# Altium PCB 2.0_GIT_SCHEMATIC.PcbDoc
Units mil, origin at the board's own origin, x right, y up, seen from the top; angles counter-clockwise.
Board outline 6000 x 4000 mil, 2 copper layers (Top Layer, Bottom Layer); 10 components, 12 nets, 49 pads, 0 vias.
Unrouted connection lines stored in the file: 3.
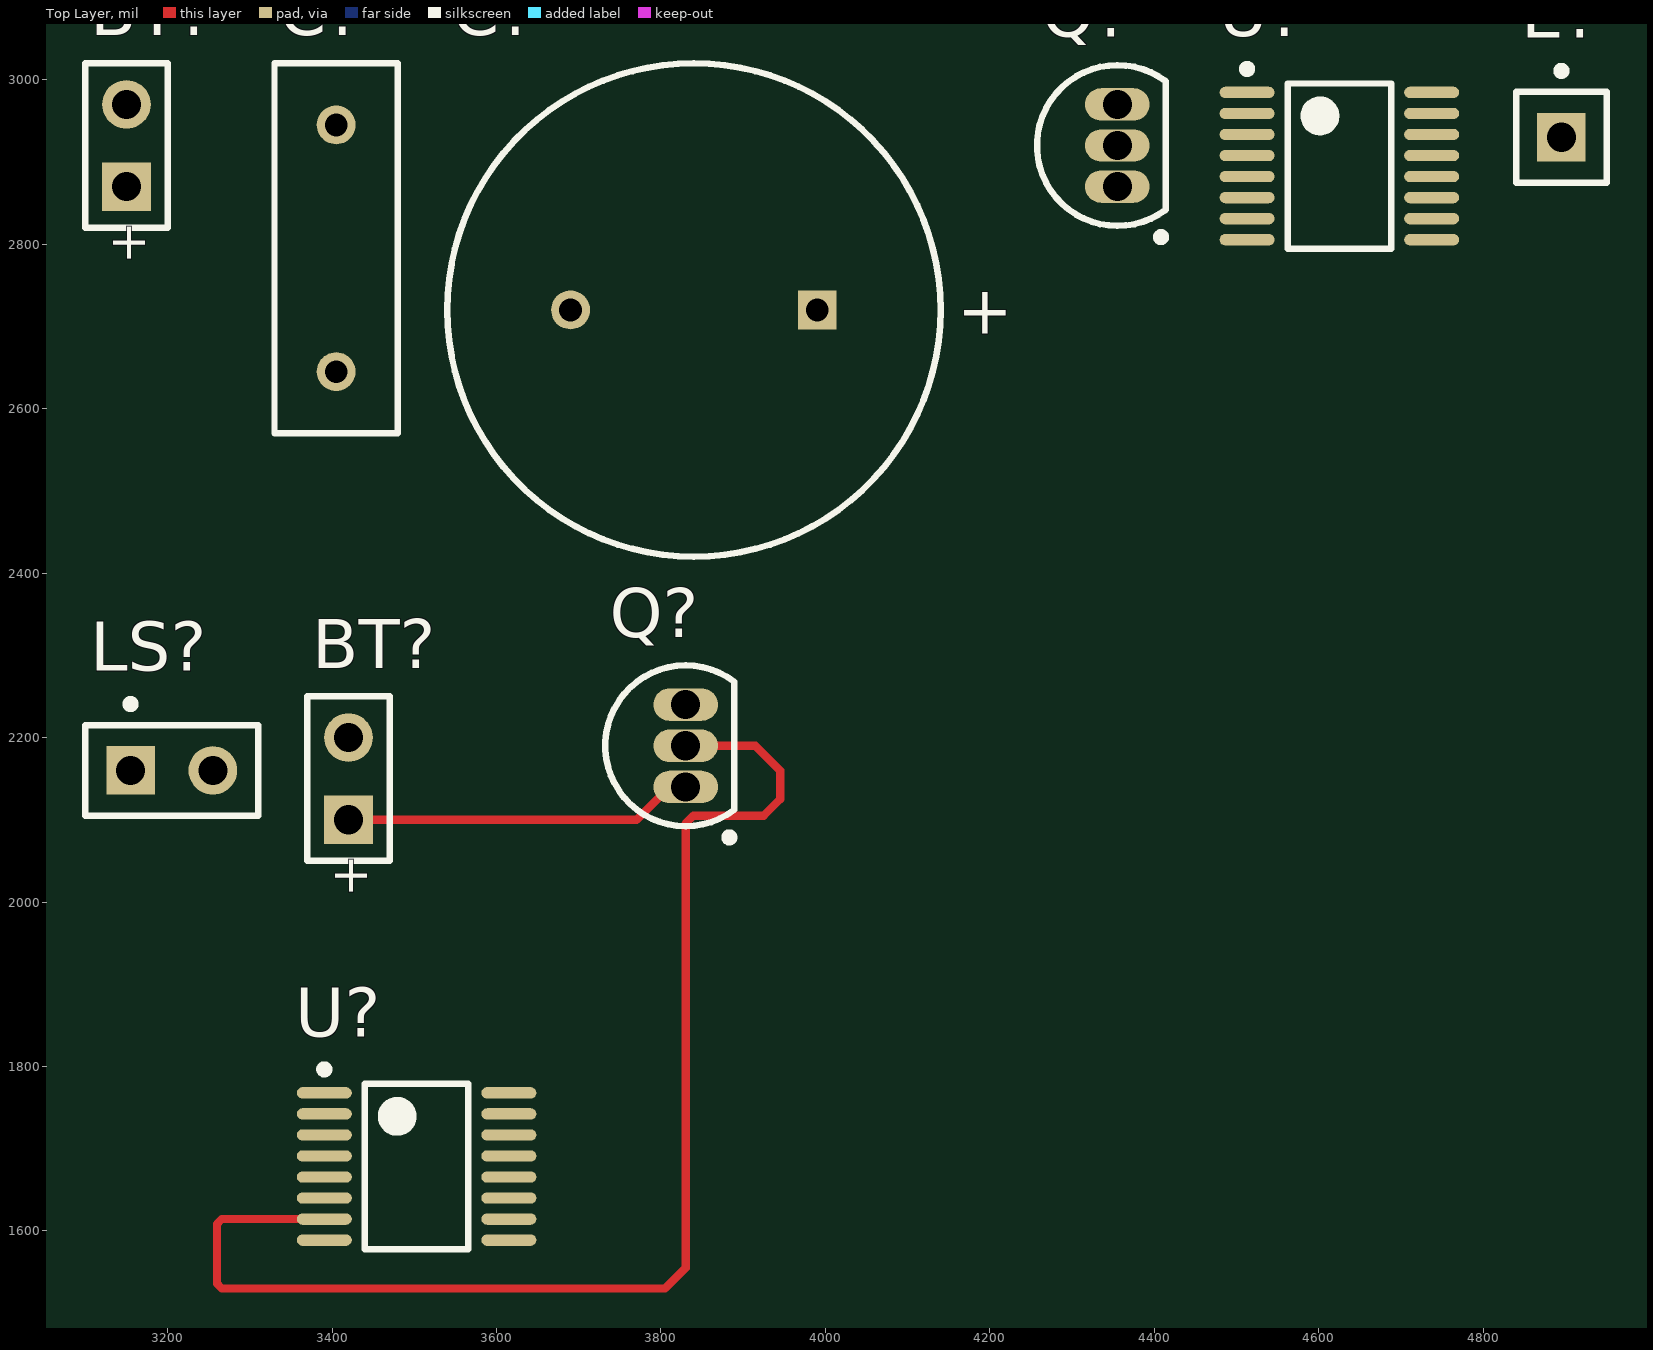
[diagram p0: Top Layer view]
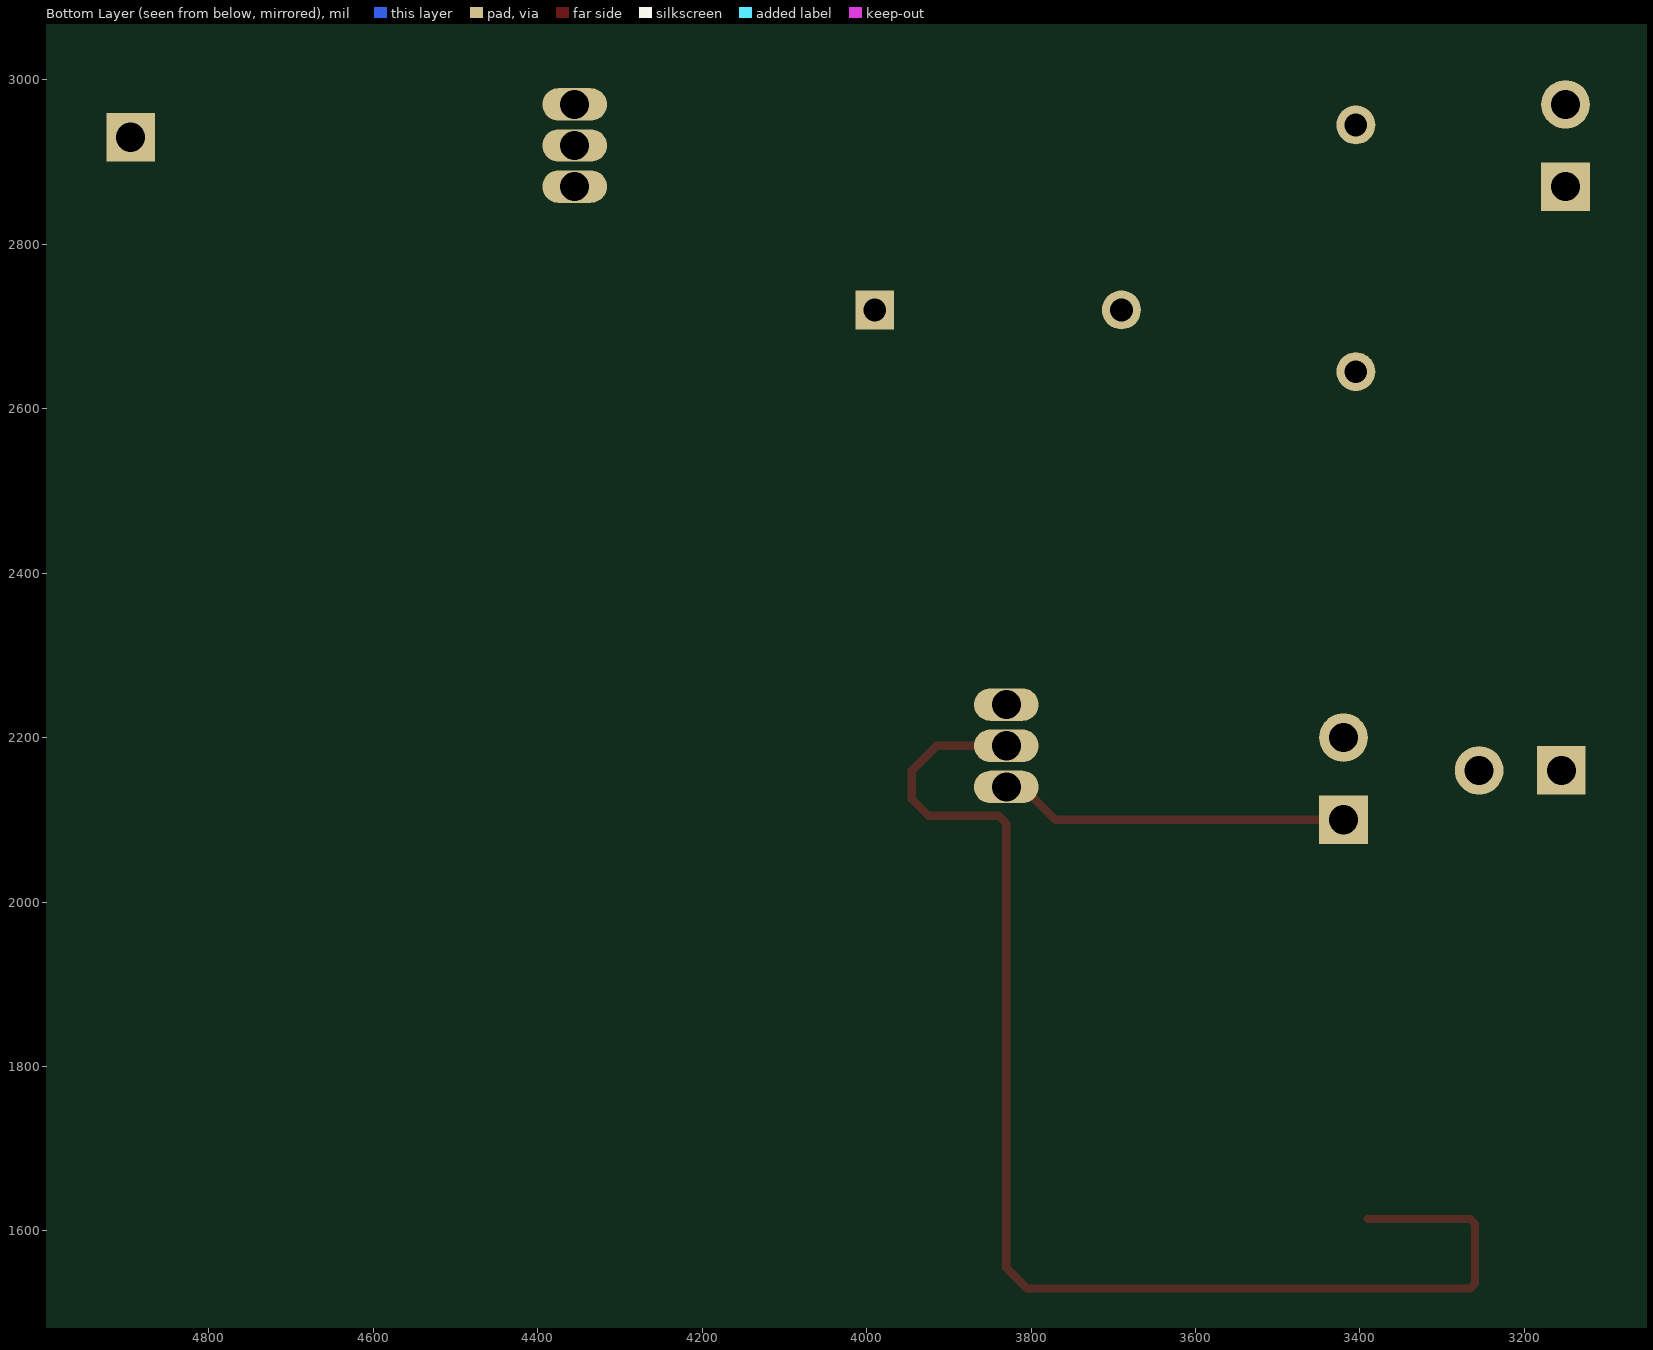
[diagram p1: Bottom Layer view, seen from below]

## Layer stack, top to bottom
Top Solder: solder mask 0.4, Solder Resist, Dk 3.5
Top Layer: signal copper 1.4
Dielectric 1: dielectric 12.6, FR-4, Dk 4.8
Bottom Layer: signal copper 1.4
Bottom Solder: solder mask 0.4, Solder Resist, Dk 3.5

## Board outline
1000,1000 7000,1000 7000,5000 1000,5000

## Design rules (kind name [scope] priority, off if disabled: settings)
Clearance [All] p1: gap=10 ignorepadtopadclearanceinfootprint=FALSE except(0: Arc-Hole Track-Hole SMDPad-Hole THPad-Hole Via-Hole Fill-Hole Poly-Hole Region-Hole Text-Hole)
PolygonConnect [All] p1: connectstyle=Relief reliefconductorwidth=10 reliefentries=4 polygonreliefangle="90 Angle" airgapwidth=10
RoomDefinition GIT_SCHEMATICS_TEST_PCB [InComponentClass('GIT_SCHEMATICS_TEST_PCB')] p1: confinementstyle=ConfineIn formatcopy=TRUE lockcomponents=FALSE outline 7045,1060 8920,1060 8920,2200 7045,2200
RoomDefinition 2.0_GIT_SCHEMATIC [InComponentClass('2.0_GIT_SCHEMATIC')] p2: confinementstyle=ConfineIn formatcopy=TRUE lockcomponents=FALSE outline 2972.2,2019.57 4672.2,2019.57 4672.2,3159.57 2972.2,3159.57
RoutingVias [All] p1: holewidth=28 width=50 viastyle="Through Hole" minholewidth=28 minwidth=50 maxholewidth=28 maxwidth=50
SolderMaskExpansion [All] p1: expansion=4 istentingtop=FALSE
Width [All] p1: maxlimit=10 minlimit=10 preferedwidth=10
30 further rules are at their usual default settings.

## Classes and differential pairs
net class TS_O: Vo
net class TS_DC-: DC-
net class TS_DC+: DC+
component class GIT_SCHEMATICS_TEST_PCB: BT? C? E? IGBT? Q? U?
component class 2.0_GIT_SCHEMATIC: BT? LS? Q? U?

## Components (designator, comment, footprint, x,y, rotation, side; value= is the part's Value field where it differs from the comment)
BT? "Battery" BAT-2 3420,2150 r90 top
BT? "Battery" BAT-2 3150,2920 r90 top
C? "Cap Pol1" RB7.6-15 3840,2720 r0 top value=100pF
C? "Cap" RAD-0.3 3405,2795 r90 top value=100pF
E? "Antenna" PIN1 4895,2930 r0 top
LS? "Bell" PIN2 3155,2160 r0 top
Q? "2N3906" TO-92A 3830,2190 r0 top
Q? "2N3904" TO-92A 4355,2920 r0 top
U? "ADC-8" SOT403-1_N 3502.8,1678.39 r0 top
U? "ADC-8" SOT403-1_N 4625,2895 r0 top

## Footprints (in the part's own frame and the unit in brackets; to place one, negate y for a bottom-side part, rotate by r counter-clockwise, add the part's x,y. Pads: shape width x height; smd on the part's side, far side on the other; paste and mask are expansions set on the pad)
BAT-2 [mm] "Battery; 2 Leads"
  rect 1.5x1.5 hole 0.9: 1(-1.27,0)
  round 1.5 hole 0.9: 2(1.27,0)
  silkscreen extent -2.54,-1.27 2.54,1.27
PIN1 [mm] "Generic Antenna; 1 Lead"
  rect 1.5x1.5 hole 0.9: 1(0,0)
  silkscreen extent -1.4,-1.4 1.4,2.17
PIN2 [mm] "Photosensitive Diode; 2 Leads"
  rect 1.5x1.5 hole 0.9: 1(0,0)
  round 1.5 hole 0.9: 2(2.54,0)
  silkscreen extent -1.4,-1.4 3.94,2.17
RAD-0.3 [mm] "Radial Cap, Thru-Hole; 2 Leads; 0.3 in Pin Spacing"
  round 1.2 hole 0.7: 1(-3.81,0) 2(3.81,0)
  silkscreen extent -5.71,-1.91 5.71,1.91
RB7.6-15 [mm] "Polarized Capacitor (Radial); 2 Leads"
  rect 1.2x1.2 hole 0.7: 1(3.81,0)
  round 1.2 hole 0.7: 2(-3.81,0)
  silkscreen extent -7.62,-7.62 7.62,7.62
SOT403-1_N [mm] "TSOP, 16-Leads, Body 5x4.4mm, Pitch 0.65mm, IPC Medium Density"
  oval 1.7x0.35 smd: 1(-2.85,2.275) 2(-2.85,1.625) 3(-2.85,0.975) 4(-2.85,0.325) 5(-2.85,-0.325) 6(-2.85,-0.975) 7(-2.85,-1.625) 8(-2.85,-2.275) 9(2.85,-2.275) 10(2.85,-1.625) 11(2.85,-0.975) 12(2.85,-0.325) 13(2.85,0.325) 14(2.85,0.975) 15(2.85,1.625) 16(2.85,2.275)
  silkscreen extent -2.97,-2.55 1.6,3.12, body extent -2.25,-2.55 2.25,2.55, height 1.1
TO-92A [mm] "TO, Flat Index; 3 In-Line, Axial Leads; Body Dia. 4.5mm; Leads 0.51 x 0.48 mm (max)"
  oval 2x1 hole 0.9: 1(0,-1.27) 2(0,0) 3(0,1.27)
  silkscreen extent -2.48,-2.95 1.5,2.48, body extent -2.48,-2.5 1.5,2.5, height 6.86

## Part data
BT? BT?: "Multicell Battery", LatestRevisionDate=17-Jul-2002, LatestRevisionNote="Re-released for DXP Platform.", PackageDescription="Battery; 2 Leads", PackageReference=BAT-2, Published=24-Mar-1999, Publisher="Altium Limited"
C?: "Polarized Capacitor (Radial)", LatestRevisionDate=17-Jul-2002, LatestRevisionNote="Re-released for DXP Platform.", PackageDescription="Polarized Capacitor (Radial); 2 Leads", PackageReference=RB7.6-15, Published=8-Jun-2000, Publisher="Altium Limited"
C?: "Capacitor", LatestRevisionDate=17-Jul-2002, LatestRevisionNote="Re-released for DXP Platform.", PackageDescription="Radial Cap, Thru-Hole; 2 Leads; 0.3 in Pin Spacing", PackageReference=RAD-0.3, Published=8-Jun-2000, Publisher="Altium Limited"
E?: "Generic Antenna", LatestRevisionDate=17-Jul-2002, LatestRevisionNote="Re-released for DXP Platform.", PackageReference=PIN1, Published=24-Mar-1999, Publisher="Altium Limited"
LS?: "Electrical Bell", LatestRevisionDate=17-Jul-2002, LatestRevisionNote="Re-released for DXP Platform.", PackageReference=PIN2, Published=24-Mar-1999, Publisher="Altium Limited"
Q?: "PNP General Purpose Amplifier", ComponentLink1Description="Manufacturer Link", ComponentLink1URL=http://www.fairchildsemi.com/, ComponentLink2Description=Datasheet, ComponentLink2URL=http://www.fairchildsemi.com/ds/2N%2F2N3906.pdf, DatasheetVersion=1997, LatestRevisionDate=15-Jan-2003, LatestRevisionNote="PCB Footprint 'BCY-W3/D4.7' replaced", PackageDescription="TO, Flat Index; 3 In-Line, Axial Leads; Body Dia. 4.5mm; Leads 0.51 x 0.48 mm (max)", PackageReference=TO-92A, PackageVersion=Sep-1998, Published=8-Jun-2000, Publisher="Altium Limited"
Q?: "NPN General Purpose Amplifier", ComponentLink1Description="Manufacturer Link", ComponentLink1URL=http://www.fairchildsemi.com/, ComponentLink2Description=Datasheet, ComponentLink2URL=http://www.fairchildsemi.com/ds/2N%2F2N3904.pdf, DatasheetVersion=1997, LatestRevisionDate=15-Jan-2003, LatestRevisionNote="PCB Footprint 'BCY-W3/D4.7' replaced", PackageDescription="TO, Flat Index; 3 In-Line, Axial Leads; Body Dia. 4.5mm; Leads 0.51 x 0.48 mm (max)", PackageReference=TO-92A, PackageVersion=Sep-1998, Published=8-Jun-2000, Publisher="Altium Limited"
U? U?: "Generic 8-Bit A/D Converter", Code_JEDEC=MO-153, LatestRevisionDate=29-May-2009, LatestRevisionNote="IPC-7351 Footprint Added.", PackageDescription="16-Pin Thin Small Outline Package 0.65 mm Pitch", PackageReference=SOT403-1, PackageVersion=Mar-2002, Published=8-Jun-2000, Publisher="Altium Limited"

## Nets (pads, with @x,y where several pads share a name; then routed paths per layer and width w, separated by ;. In a path a pad name is that pad's centre, name@x,y a point inside that pad or via, vN(x,y) a via of type N, cw(c..) or ccw(c..) an arc to the next point about the centre after c; other vN are vias at no path point)
DC+: 
DC-: 
GND: U?.8@3390.59,1588.82
NetBT?_1: BT?.1@3420,2100 Q?.1@3830,2140 | length 426.6
  Top Layer w10: BT?.1@3420,2100 3770.32,2100 3810.32,2140 Q?.1@3830,2140
NetBT?_2: BT?.2@3420,2200 U?.1@3390.59,1767.95
NetIGBT?_1: 
NetIGBT?_6: 
NetIGBT?_7: 
NetLS?_1: LS?.1 Q?.3@3830,2240
NetLS?_2: LS?.2 U?.11@3615,1640
NetQ?_2: Q?.2@3830,2190 U?.7@3390.59,1614.41 | length 1618.5
  Top Layer w10: U?.7@3390.59,1614.41 3265.86,1614.41 3260,1608.55 3260,1535.86 3265.86,1530 3805,1530 3830,1555 3830,2095.31 3839.69,2105 3925,2105 3945,2125 3945,2160 3915,2190 Q?.2@3830,2190
Vo: 
pads on no net: BT?.1@3150,2870 BT?.2@3150,2970 C?.1 C?.2 E?.1 Q?.1@4355,2870 Q?.2@4355,2920 Q?.3@4355,2970 U?.1@4512.8,2984.57 U?.2 U?.3 U?.4 U?.5 U?.6 U?.7@4512.8,2831.02 U?.8@4512.8,2805.43 U?.9 U?.10 U?.11@4737.2,2856.61 U?.12 U?.13 U?.14 U?.15 U?.16

## Text inside footprints (layer, text, board x,y; h text height)
BT?: Top Overlay "+" at 3172.72,2775.51 h45.28 r90
BT?: Top Overlay "+" at 3442.72,2005.51 h45.28 r90
C?: Top Overlay "+" at 4160.15,2690.99 h59.06